# Altium PCB PIC0_D4_SD_card_T3.PcbDoc (part 1 of 2)
Units mm, origin at the board's own origin, x right, y up, seen from the top; angles counter-clockwise.
Board outline 20 x 34 mm, 2 copper layers (Top Layer, Bottom Layer), stack 1.671 mm thick; 52 components, 65 nets, 236 pads, 240 vias.
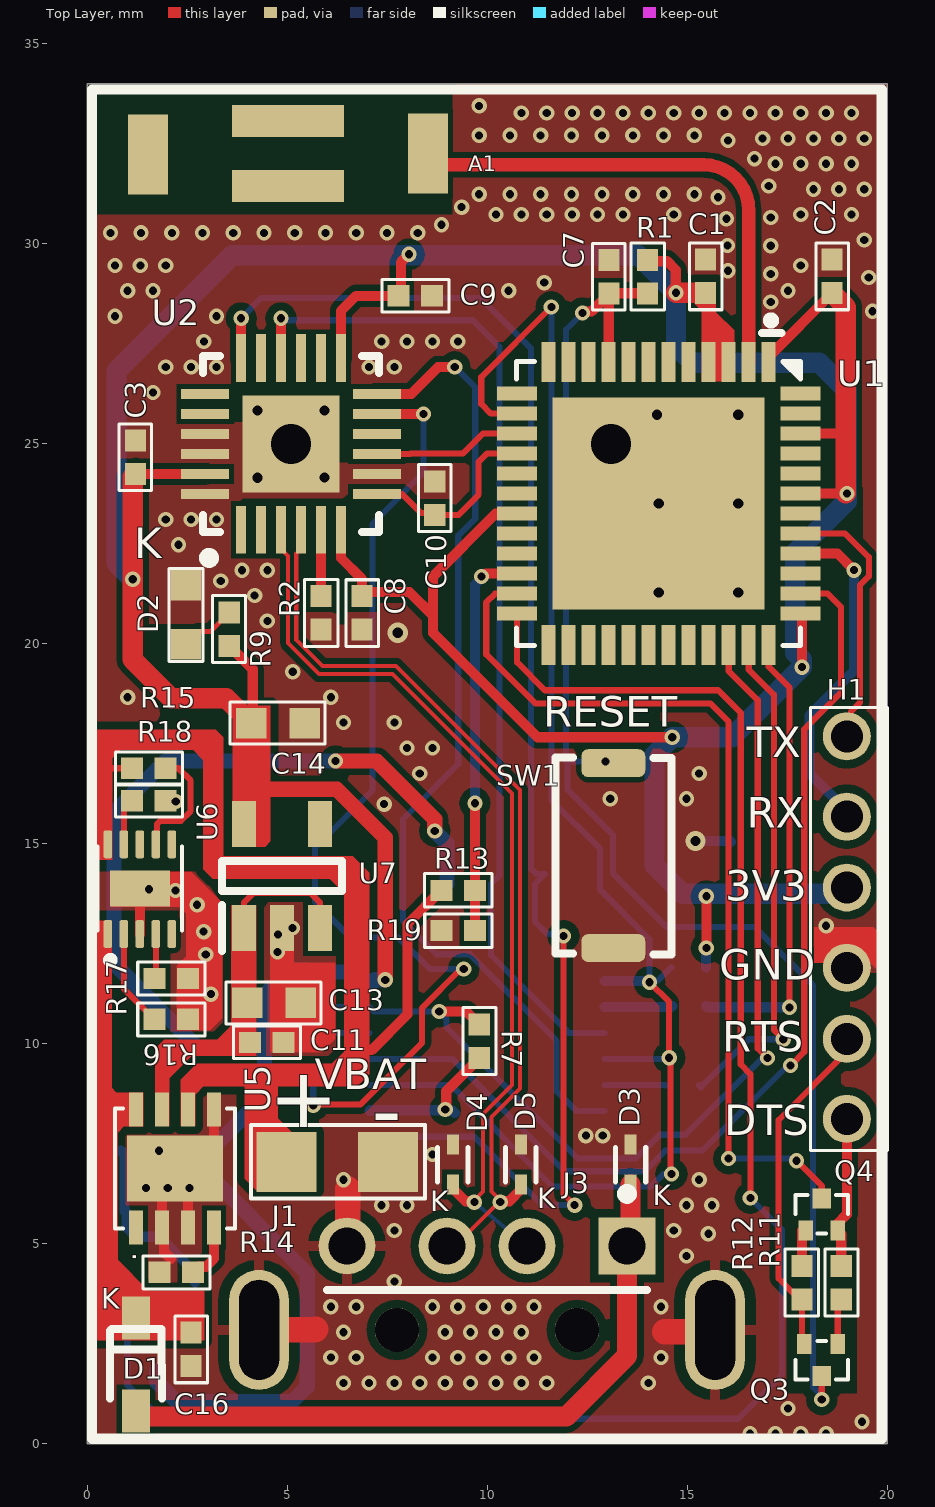
[diagram p0: Top Layer view]
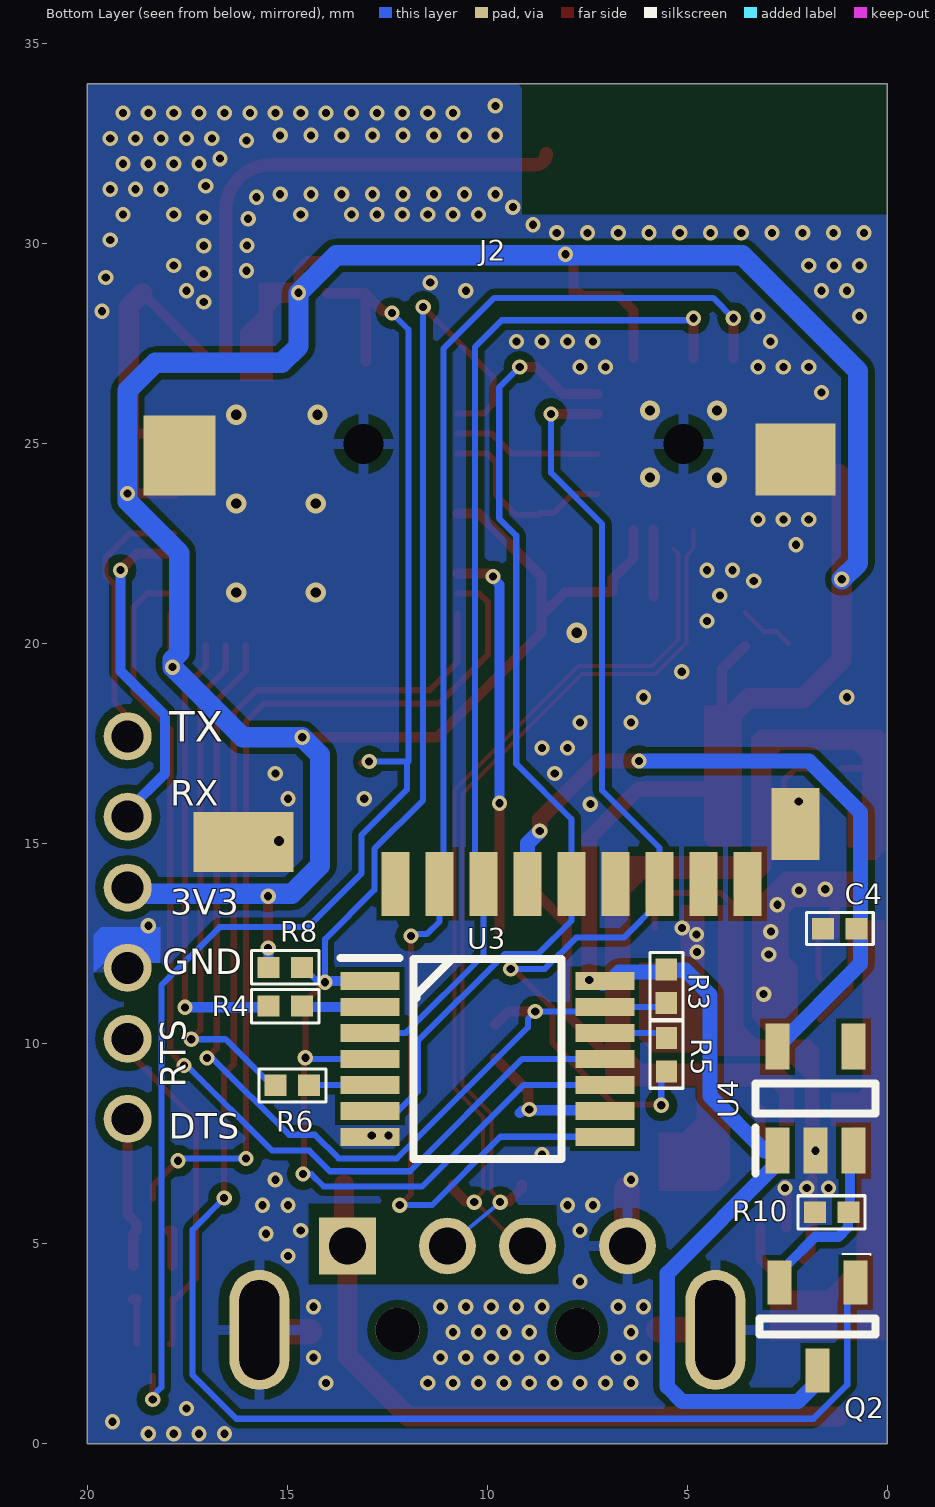
[diagram p1: Bottom Layer view, seen from below]

## Layer stack, top to bottom
Top Solder: solder mask 0.0102, Solder Resist, Dk 3.5
Top Layer: signal copper 0.0356
Dielectric 1: dielectric 1.6, FR-4, Dk 4.8
Bottom Layer: signal copper 0.0356
Bottom Solder: solder mask 0.0102, Solder Resist, Dk 3.5

## Board outline
0,0 20,0 20,34 0,34

## Design rules (kind name [scope] priority, off if disabled: settings)
Clearance [All] p1: gap=0.102 ignorepadtopadclearanceinfootprint=TRUE except(0: Arc-Text Track-Text SMDPad-Text THPad-Text Via-Text Fill-Text Poly-Text Region-Text Text-Text Text-Hole; 0.127: SMDPad-Fill SMDPad-Poly SMDPad-Region; 0.152: Arc-Fill Arc-Poly Arc-Region Track-Fill Track-Poly Track-Region; 0.203: THPad-Fill THPad-Poly THPad-Region Via-Fill Via-Poly Via-Region Fill-Fill Fill-Poly Fill-Region Poly-Poly Poly-Region Region-Region)
DiffPairsRouting DiffPair_DIFF90_DiffPairsRouting [InDifferentialPairClass('DIFF90')] p1: maxlimit=0.114 minlimit=0.114 mostfreqgap=0.114 toplayer_minwidth=0.101 toplayer_maxwidth=0.101 toplayer_prefwidth=0.101 bottomlayer_minwidth=0.101 bottomlayer_maxwidth=0.101 bottomlayer_prefwidth=0.101 maxuncoupledlength=0
MatchedLengths DiffPair_DIFF90_MatchedLengths [InDifferentialPairClass('DIFF90')] p1: tolerance=25.4 checknetsindiffpair=TRUE checkdiffpairvsdiffpair=FALSE checkxsignals=FALSE checkothers=FALSE usedelayunits=FALSE
PlaneConnect [All] p1: planeconnectstyle=Relief reliefexpansion=0.508 reliefentries=4 reliefconductorwidth=0.254 reliefairgap=0.127
PolygonConnect [All] p1: thpad.connectstyle=Relief thpad.reliefconductorwidth=0.254 thpad.reliefentries=4 thpad.polygonreliefangle="90 Angle" thpad.airgapwidth=0.254 smdpad.connectstyle=Direct smdpad.reliefconductorwidth=0.254 smdpad.reliefentries=4 smdpad.polygonreliefangle="90 Angle" smdpad.airgapwidth=0.254 via.connectstyle=Direct via.reliefconductorwidth=0.254 via.reliefentries=4 via.polygonreliefangle="90 Angle" via.airgapwidth=0.254
RoutingVias [All] p1: holewidth=0.203 width=0.381 viastyle="Through Hole" minholewidth=0.203 minwidth=0.381 maxholewidth=0.203 maxwidth=0.508
SilkToSilkClearance [All] p1: silktosilkclearance=0.102
SilkToSolderMaskClearance [IsPad] p1: minsilkscreentomaskgap=0.102 clearancetoexposedcopper=TRUE
SolderMaskExpansion [All] p1: expansion=0.102
Width [All] p1: maxlimit=12.7 minlimit=0.127 preferedwidth=0.254 minimp=50.000000 maximp=50.000000 favimp=50.000000
26 further rules are at their usual default settings.

## Classes and differential pairs
net class DIFF90: USB_N USB_P
differential pair USB: +USB_P -USB_N

## Components (designator, comment, footprint, x,y, rotation, side; value= is the part's Value field where it differs from the comment)
A1 "Ant" ANT_2450AT43B100E 5.029,32.258 r180 top
C1 "0.1uF" CAPC0402 15.461,29.195 r90 top
C2 "0.1uF" CAPC0402 18.626,29.195 r90 top
C3 "0.1uF" CAPC0402 1.212,24.663 r270 top
C4 "0.1uF" CAPC0402 1.196,12.88 r0 bottom
C7 "0.1uF" CAPC0402 13.048,29.175 r270 top
C8 "0.1uF" CAPC0402 6.872,20.775 r90 top
C9 "0.1uF" CAPC0402 8.204,28.702 r180 top
C10 "0.1uF" CAPC0402 8.695,23.641 r270 top
C11 "0.1uF" CAPC0402 4.496,10.033 r180 top
C13 "10uF" CAPC0603 4.674,11.024 r0 top
C14 "10uF" CAPC0603 4.775,18.016 r0 top
C16 "0.1uF" CAPC0402 2.597,2.369 r90 top
D1 "BAT760-7" SOD2513X120N 1.225,1.981 r270 top
D2 "RED LED" LED_0603 2.469,20.734 r90 top
D3 "ESD9X5.0ST5G" SOD-923 13.589,6.985 r90 top
D4 "ESD9X5.0ST5G" SOD-923 9.144,6.985 r90 top
D5 "ESD9X5.0ST5G" SOD-923 10.846,6.985 r90 top
H1 "HEADER 6" HEADER_2MM 18.996,12.907 r90 top
J1 "BAT" "HDR1X2H - DUPLICATE" 6.261,7.054 r0 top
J2 "DM3AT-SF-PEJM5(40)" "SD CARD CONNECTOR" 10,19.5 r0 bottom locked
J3 "USB MALE" MOLEX_48037-0001_0 10,3.9 r0 top locked
Q2 "Transistor NPN" SOT95P240X115-3N 1.747,2.937 r270 bottom
Q3 "MMBT2222AM3T5G" SOT-723#1 18.368,2.101 r180 top
Q4 "MMBT2222AM3T5G" SOT-723#2 18.368,5.74 r0 top
R1 "Res1" RESC0402 14.013,29.185 r90 top value=10k
R2 "" RESC0402 5.85,20.775 r90 top value=680R
R3 "Res1" RESC0402 5.531,11.444 r90 bottom value=10k
R4 "Res1" RESC0402 15.055,10.947 r180 bottom value=3.3k
R5 "" RESC0402 5.521,9.732 r270 bottom value=3.3k
R6 "" RESC0402 14.877,8.966 r180 bottom value=3.3k
R7 "" RESC0402 9.804,10.071 r90 top value=3.3k
R8 "Res1" RESC0402 15.055,11.912 r0 bottom value=10k
R9 "Res1" RESC0402 3.556,20.371 r270 top value=2k
R10 "Res1" resc0402 1.397,5.794 r180 bottom value=10k
R11 "Res1" resc0402 18.857,4.035 r90 top value=1k
R12 "Res1" resc0402 17.872,4.035 r270 top value=1k
R13 "Res1" resc0402 9.282,13.839 r180 top value=10k
R14 "" resc0402 2.235,4.293 r0 top value=680R
R15 "Res1" resc0402 1.549,16.891 r0 top value=10k
R16 "Res1" resc0402 2.108,10.617 r0 top value=1k
R17 "Res1" resc0402 2.108,11.633 r180 top value=2k
R18 "Res1" resc0402 1.549,16.078 r180 top value=10k
R19 "Res1" resc0402 9.284,12.834 r0 top value=10k
SW1 "SW PUSHBUTTON" Micro_push 13.157,14.707 r180 top
U1 "ESP32-PICO-D4" ESP32_PICO_D4_2 14.293,23.509 r270 top
U2 "GL823 Version A" QFN24-4X4MM 5.1,24.999 r90 top value=-
U3 "74ABT125PW_112" 74ABT125PW 10,9.627 r180 bottom locked
U4 "LDO_5V_3V" SOT25 1.8,8.63 r90 bottom value="LDO 5-3.3"
U5 "TPS2113ADRBR" SON-8 2.199,6.884 r90 top
U6 "BQ24040DSQR" 10-WFDFN 1.321,13.868 r90 top
U7 "LDO_5V_3V" SOT25 4.877,14.199 r90 top value="LDO 5-3.3"

## Footprints (in the part's own frame and the unit in brackets; to place one, negate y for a bottom-side part, rotate by r counter-clockwise, add the part's x,y. Pads: shape width x height; smd on the part's side, far side on the other; paste and mask are expansions set on the pad)
10-WFDFN [mm]
  rrect55% 0.7x0.22 smd: 1(-1.121,0.8) 2(-1.121,0.4) 3(-1.121,0) 4(-1.121,-0.4) 5(-1.121,-0.8) 6(1.121,-0.8) 7(1.121,-0.4) 8(1.121,0) 9(1.121,0.4) 10(1.121,0.8)
  rect 0.9x1.5 smd: 11(0.013,0)
  silkscreen extent -1.85,-1.06 1.06,1.06, body extent -1.04,-1.1 1.06,1.1, height 0.8
74ABT125PW [mm]
  rect 1.475x0.45 smd: 1(-2.938,1.95) 2(-2.938,1.3) 3(-2.938,0.65) 4(-2.938,0) 5(-2.938,-0.65) 6(-2.938,-1.3) 7(-2.938,-1.95) 8(2.938,-1.95) 9(2.938,-1.3) 10(2.938,-0.65) 11(2.938,0) 12(2.938,0.65) 13(2.938,1.3) 14(2.938,1.95)
  silkscreen extent -3.67,-2.5 1.85,2.52, body extent -3.2,-2.5 3.2,2.5, height 1.1
ANT_2450AT43B100E [mm]
  rect 1x2 smd: 1(-3.5,0) 4(3.5,0.025)
  rect 2.8x0.8 smd: 2(0,-0.815) 3(0,0.815)
  body extent -3.5,-1.04 3.5,1.04, height 2.1
CAPC0402 [mm]
  rect 0.55x0.53 smd: 1(-0.419,0) 2(0.419,0)
  silkscreen extent -0.84,-0.41 0.83,0.4, body extent -0.5,-0.3 0.5,0.3, height 0.2
CAPC0603 [mil]
  rect 30x30 smd: 1(-26.26,0) 2(26.26,0)
  silkscreen extent -47,-20 46,21, body extent -31,-16 31,16, height 9
ESP32_PICO_D4_2 [mm]
  rect 1x0.35 smd: 1(-3.54,2.75) 2(-3.54,2.25) 3(-3.54,1.75) 4(-3.54,1.25) 5(-3.54,0.75) 6(-3.54,0.25) 7(-3.54,-0.25) 8(-3.54,-0.75) 9(-3.54,-1.25) 10(-3.54,-1.75) 11(-3.54,-2.25) 12(-3.54,-2.75) 25(3.54,-2.75) 26(3.54,-2.25) 27(3.54,-1.75) 28(3.54,-1.25) 29(3.54,-0.75) 30(3.54,-0.25) 31(3.54,0.25) 32(3.54,0.75) 33(3.54,1.25) 34(3.54,1.75) 35(3.54,2.25) 36(3.54,2.75)
  rect 0.35x1 smd: 13(-2.75,-3.54) 14(-2.25,-3.54) 15(-1.75,-3.54) 16(-1.25,-3.54) 17(-0.75,-3.54) 18(-0.25,-3.54) 19(0.25,-3.54) 20(0.75,-3.54) 21(1.25,-3.54) 22(1.75,-3.54) 23(2.25,-3.54) 24(2.75,-3.54) 37(2.75,3.54) 38(2.25,3.54) 39(1.75,3.54) 40(1.25,3.54) 41(0.75,3.54) 42(0.25,3.54) 43(-0.25,3.54) 44(-0.75,3.54) 45(-1.25,3.54) 46(-1.75,3.54) 47(-2.25,3.54) 48(-2.75,3.54)
  rect 5.3x5.3 smd: 49(0,0)
  Top Layer pour cut-out: -2.652,2.422 -2.423,2.651 -2.653,2.651
  silkscreen extent -4.68,-3.55 3.55,3.55, body extent -3.5,-3.5 3.5,3.5, height 0.26
"HDR1X2H - DUPLICATE" [mm] "Connector; Header; 2 Position; Right Angle"
  rect 1.5x1.5 smd: 1(-1.27,0) 2(1.27,0)
  silkscreen extent -2.16,-0.91 2.18,0.91
HEADER_2MM [mm]
  round 1.2 hole 0.8: 1(-4.782,0) 2(-2.782,0) 3(-1.004,0) 4(1.003,0) 5(2.775,0) 6(4.782,0)
  silkscreen extent -5.57,-1.02 5.51,0.91
LED_0603 [mil]
  rect 30x30 smd: 1(-29.02,0) 2(29.02,0)
  silkscreen extent -46,-17 45,17, body extent -32,-14 32,14, height 25
Micro_push [mm]
  rrect50% 1.6x0.7 smd: 1(0,2.311) 2(0,-2.311)
  silkscreen extent -1.45,-2.45 1.45,2.46, body extent -1.45,-2.45 1.45,2.45, height 1.95
MOLEX_48037-0001_0 [mm]
  rect 1.42x1.42 hole 0.92 paste-1000 mask+0: 1(3.5,1.05)
  round 1.42 hole 0.92 paste-1000 mask+0: 2(1,1.05) 3(-1,1.05) 4(-3.5,1.05)
  oval 1.5x3 hole 1 slot 2.5 at 90 deg paste-1000 mask+0: 5(-5.7,-1.05) 6(5.7,-1.05)
  round 1.1 hole 1.1 unplated paste-1000 mask+0: ""(-2.25,-1.05) ""(2.25,-1.05)
  silkscreen extent -4,-0.05 4,2.47, body extent -6.3,-18.76 6.3,1.16, height 3
QFN24-4X4MM [mm] "QFN24L (4x4x1) 0.5 pitch_STPM32"
  rect 1.194x0.25 smd: 1(-2.147,1.25) 2(-2.147,0.75) 3(-2.147,0.25) 4(-2.147,-0.25) 5(-2.147,-0.75) 6(-2.147,-1.25) 13(2.147,-1.25) 14(2.147,-0.75) 15(2.147,-0.25) 16(2.147,0.25) 17(2.147,0.75) 18(2.147,1.25)
  rect 0.25x1.194 smd: 7(-1.25,-2.147) 8(-0.75,-2.147) 9(-0.25,-2.147) 10(0.25,-2.147) 11(0.75,-2.147) 12(1.25,-2.147) 19(1.25,2.147) 20(0.75,2.147) 21(0.25,2.147) 22(-0.25,2.147) 23(-0.75,2.147) 24(-1.25,2.147)
  rect 2.43x2.43 smd: 25(0,0)
  silkscreen extent -2.97,-2.2 2.2,2.2, body extent -2.05,-2.05 2.05,2.05, height 1
RESC0402 [mm]
  rect 0.55x0.53 smd: 1(0.419,0) 2(-0.419,0)
  silkscreen extent -0.84,-0.42 0.84,0.41, body extent -0.5,-0.25 0.5,0.25, height 0.26
resc0402 [mm]
  rect 0.55x0.53 smd: 1(0.419,0) 2(-0.419,0)
  silkscreen extent -0.84,-0.42 0.84,0.41, body extent -0.5,-0.25 0.5,0.25, height 0.31
"SD CARD CONNECTOR" [mm]
  rect 0.7x1.6 smd: 1(2.3,5.499) 2(1.2,5.499) 3(0.1,5.499) 4(-1,5.499) 5(-2.1,5.499) 6(-3.2,5.499) 7(-4.3,5.499) 8(-5.4,5.499) 9(-6.5,5.499)
  rect 2x1.8 smd: 6(-7.7,-5.109)
  rect 1.2x1.8 smd: 6(-7.7,3.999)
  round 0 hole 1: 6(-4.9,-5.499) 6(3.1,-5.499)
  rect 2.5x1.5 smd: 6(6.1,4.452)
  rect 1.8x2 smd: 6(7.7,-5.209)
  body extent -7.38,-9.9 6.47,6.25, height 1.68
SOD2513X120N [mm]
  rect 1.075x0.7 smd: 1(-1.162,0) 2(1.162,0)
  silkscreen extent -0.89,-0.65 0.85,0.65, body extent -1.34,-0.65 1.16,0.65, height 1.2
SOD-923 [mm]
  rect 0.5x0.3 smd: 1(-0.5,0) 2(0.5,0)
  silkscreen extent -0.43,-0.38 0.43,0.38, body extent -0.52,-0.32 0.53,0.32, height 0.43
SON-8 [mm]
  rect 0.85x0.35 smd: 1(-1.475,0.975) 2(-1.475,0.325) 3(-1.475,-0.325) 4(-1.475,-0.975) 5(1.475,-0.975) 6(1.475,-0.325) 7(1.475,0.325) 8(1.475,0.975)
  rect 1.65x2.4 smd: 9(0,0)
  Top Layer region: 0,1.2 0,1.2 0,1.2 0,1.2 0,1.2 0,1.2 0,1.2 0,1.2
  Top Layer region: 0,-1.2 0,-1.2 0,-1.2 0,-1.2 0,-1.2 0,-1.2 0,-1.2 0,-1.2
  silkscreen extent -1.5,-1.5 1.5,1.5, body extent -1.5,-1.5 1.5,1.5, height 0.77
SOT25 [mm]
  rect 1.15x0.6 smd: 1(-1.3,0.95) 2(-1.3,0) 3(-1.3,-0.95) 4(1.3,-0.95) 5(1.3,0.95)
  silkscreen extent -1.88,-1.5 0.38,1.5, body extent -1.45,-1.5 1.4,1.5, height 1.3
SOT95P240X115-3N [mm]
  rect 1.1x0.6 smd: 1(-1.1,0.95) 2(-1.1,-0.95) 3(1.1,0)
  silkscreen extent -1.81,-1.45 0.2,1.45, body extent -1.42,-1.5 1.42,1.5, height 1.1
SOT-723#1 [mm]
  rect 0.37x0.5 smd mask+0.05: 1(-0.4,-0.4) 2(0.437,-0.4)
  rect 0.47x0.5 smd mask+0.05: 3(0,0.4)
  silkscreen extent -0.66,-0.48 0.66,0.49, body extent -0.61,-0.53 0.64,0.52, height 0.45
SOT-723#2 [mm]
  rect 0.37x0.5 smd mask+0.05: 1(-0.4,-0.4) 2(0.4,-0.4)
  rect 0.47x0.5 smd mask+0.05: 3(0,0.4)
  silkscreen extent -0.66,-0.48 0.66,0.49, body extent -0.61,-0.53 0.64,0.52, height 0.45

## Part data
A1: "High Frequency Ceramic Solutions 4-Pin SMD T/R", Case/Package=SMD/SMT, Frequency=2.4GHz, Manufacturer=Johanson, Manufacturer Part Number=2450AT43B100E, Max Frequency=2.5GHz, Max Power Dissipation=2W, Package Quantity=1, Supplier Part Number 1=712-1010-1-ND, Category="RF Antennas", ComponentLink1Description=https://datasheet.ciiva.com/24068/2450at43b100-242468-24068034.pdf?src-supplier=Mouser, ComponentLink1URL=https://datasheet.ciiva.com/24068/2450at43b100-242468-24068034.pdf?src-supplier=Mouser, ComponentLink2Description=https://datasheet.ciiva.com/2792/jti-antenna-2450at43b100-09042008-2792593.pdf?src-supplier=Digi-Key, ComponentLink2URL=https://datasheet.ciiva.com/2792/jti-antenna-2450at43b100-09042008-2792593.pdf?src-supplier=Digi-Key, ComponentLink3Description=https://datasheet.ciiva.com/7633/1860765-7633973.pdf?src-supplier=Element14, ComponentLink3URL=https://datasheet.ciiva.com/7633/1860765-7633973.pdf?src-supplier=Element14, Contact Plating=Tin, Gain=-0.5dB, Height=0.079inch, Impedance=50R, Length=7mm, Mount="Surface Mount", Number of Bands=1, Number of Pins=4, Packaging="Tape and Reel", Power Rating=2W, Pricing 1="1=0.71000, 10=0.62400, 25=0.58600, 100=0.47820, 250=0.44416, 500=0.37800 (USD)", Radiation Hardening=No, REACH SVHC=Unknown, Return Loss=-9.5dB, RoHS=Yes, Stock 1=63050, Supplier 1=Digi-Key, Termination=Solder, Width=2mm
C1 C2 C3 C4 C7 C8 C9 C10 C11 C16: library part Cap, "Ceramic Capacitor,100nF,16V,0402", Capacitance=100nF, Case/Package=0402, Case Code (Metric)=1608, Dielectric=X7R, Dielectric Material=Ceramic, Manufacturer=TDK, Manufacturer Part Number=C1608X7R1C104K, Max Operating Temperature=125°C, Mfr.=C0805C104K1RECAUTO, Min Operating Temperature=-55°C, Package Quantity=1, Supplier Part Number 1=445-1317-6-ND, Tolerance=10%, Voltage Rating=16V, Case Code (Imperial)=0402, ComponentLink1Description=https://media.digikey.com/pdf/Data%20Sheets/TDK%20PDFs/C_Series_GeneralAppl_Spec_rev_0.3_201012.pdf?src-supplier=Digi-Key, ComponentLink1URL=https://media.digikey.com/pdf/Data%20Sheets/TDK%20PDFs/C_Series_GeneralAppl_Spec_rev_0.3_201012.pdf?src-supplier=Digi-Key, ComponentLink2Description=https://media.digikey.com/pdf/Data%20Sheets/TDK%20PDFs/C_Series_GeneralAppl_B11.pdf?src-supplier=Digi-Key, ComponentLink2URL=https://media.digikey.com/pdf/Data%20Sheets/TDK%20PDFs/C_Series_GeneralAppl_B11.pdf?src-supplier=Digi-Key, ComponentLink3Description=https://www.verical.com/server-webapp/html/getDatasheet?partID=169336&src-supplier=Verical, ComponentLink3URL=https://www.verical.com/server-webapp/html/getDatasheet?partID=169336&src-supplier=Verical, ComponentLink4Description=http://www.tdk.co.jp/tefe02/e412_c.pdf?src-supplier=Future+Electronics, ComponentLink4URL=http://www.tdk.co.jp/tefe02/e412_c.pdf?src-supplier=Future+Electronics, ComponentLink5Description=http://www.farnell.com/datasheets/1571323.pdf?src-supplier=Element14, ComponentLink5URL=http://www.farnell.com/datasheets/1571323.pdf?src-supplier=Element14, Composition=Ceramic, Depth=0.8mm, Height=0.8mm, Lead Free="Lead Free", Length=1.6mm, Mount="Surface Mount", Number of Pins=2, Packaging="Tape and Reel", Radiation Hardening=No, Stock 1=0, Supplier 1=Digi-Key, Termination=SMD/SMT, Thickness=0.037inch, Voltage Rating (DC)=16V, Width=0.8mm
C13 C14: library part "Cap Pol2", "Ceramic Capacitor,10uF,16V,0603", Case/Package=0603, Mfr. No=0603C106KAT2A
D1: "Schottky Diodes & Rectifiers 1A 30V LF1A, 2-Pin SOD-323", Case/Package=SOD-323, Manufacturer Part Number=BAT760-7
D2: library part LED1, "LED, RED,SMD, 0603", Case/Package=0603, Manufacturer Part Number="LED, RED,SMD, 0603"
D3 D4 D5: "12.3V Clamp 8.7A (8/20µs) Ipp Tvs Diode Surface Mount SOD-923", Breakdown Voltage=6.2V, Capacitance=65pF, Case/Package=SOD-923-2, Clamping Voltage=12.3V, Leakage Current=1uA, Manufacturer="ON Semiconductor", Max Operating Temperature=150°C, Max Power Dissipation=150mW, Max Surge Current=8.7A, Min Operating Temperature=-55°C, Operating Supply Voltage=5V, Package Quantity=1, Peak Pulse Power=107W, Power Line Protection=No, Supplier Part Number 1=ESD9X5.0ST5GOSCT-ND, Test Current=1mA, Category="ESD and Circuit Protection ICs", ComponentLink1Description=https://datasheet.ciiva.com/30478/0900766b812769b5-30478676.pdf?src-supplier=RSComponents, ComponentLink1URL=https://datasheet.ciiva.com/30478/0900766b812769b5-30478676.pdf?src-supplier=RSComponents, ComponentLink2Description=https://datasheet.ciiva.com/25958/esd9x3-3st5g-d-25958458.pdf?src-supplier=Avnet+Europe, ComponentLink2URL=https://datasheet.ciiva.com/25958/esd9x3-3st5g-d-25958458.pdf?src-supplier=Avnet+Europe, ComponentLink3Description=https://datasheet.ciiva.com/1219/1748783-1219324.pdf?src-supplier=Newark, ComponentLink3URL=https://datasheet.ciiva.com/1219/1748783-1219324.pdf?src-supplier=Newark, ComponentLink4Description=https://datasheet.ciiva.com/3304/esd9x3-3st5g-d-3304012.pdf?src-supplier=Avnet, ComponentLink4URL=https://datasheet.ciiva.com/3304/esd9x3-3st5g-d-3304012.pdf?src-supplier=Avnet, ComponentLink5Description=https://datasheet.ciiva.com/339/esd9x3-3st5g-d-339709.pdf?src-supplier=Digi-Key, ComponentLink5URL=https://datasheet.ciiva.com/339/esd9x3-3st5g-d-339709.pdf?src-supplier=Digi-Key, ComponentLink6Description=https://datasheet.ciiva.com/16215/esd9x3-3st5g-d-16215149.pdf?src-supplier=Future+Electronics, ComponentLink6URL=https://datasheet.ciiva.com/16215/esd9x3-3st5g-d-16215149.pdf?src-supplier=Future+Electronics, ComponentLink7Description=https://datasheet.ciiva.com/339/esd9x3-3st5g-d-339710.pdf?src-supplier=Digi-Key, ComponentLink7URL=https://datasheet.ciiva.com/339/esd9x3-3st5g-d-339710.pdf?src-supplier=Digi-Key, ComponentLink8Description=https://datasheet.ciiva.com/339/esd9x3-3st5g-d-339711.pdf?src-supplier=Digi-Key, ComponentLink8URL=https://datasheet.ciiva.com/339/esd9x3-3st5g-d-339711.pdf?src-supplier=Digi-Key, Composition=Zener, Contact Plating=Tin,Matte, Depth=0.6mm, Direction=Unidirectional, Element Configuration=Single, ESD Protection=Yes, Halogen Free="Halogen Free", Height=0.4mm, Lead Free="Lead Free", Length=0.8mm, Manufacturer Part Number=ESD9X5.0ST5G, Max Breakdown Voltage=6.2V, Max Reverse Leakage Current=1uA, Min Breakdown Voltage=6.2V, Number of Channels=1, Number of Elements=1, Number of Lines=1, Number of Pins=2, Number of Unidirectional Channels=1, Packaging="Tape and Reel", Peak Pulse Current=8.7A, Polarity=Unidirectional, Pricing 1="1=0.14000, 10=0.12700, 25=0.12120, 100=0.05340, 250=0.05120, 500=0.04190, 1000=0.02910, 2500=0.02542 (USD)", Radiation Hardening=No, REACH SVHC="No SVHC", Reverse Breakdown Voltage=6.2V, Reverse Standoff Voltage=5V, RoHS=Yes, Stock 1=835133, Supplier 1=Digi-Key, Termination=SMD/SMT, Width=0.65mm, Working Voltage=5V
H1: "Header, 6-Pin,2MM", Case/Package=TH, Manufacturer Part Number="2mm PITCH"
J1: library part "Header 2 pin"
J2: "Micro SD Memory Card Socket", Manufacturer_Name=Hirose, Mouser Part Number=798-DM3AT-SF-PEJM540, RS Part Number=7079520P, Allied_Number=R1050628, Allied Price/Stock=http://www.alliedelec.com/hirose-electric-dm3at-sf-pejm5-40-/R1050628/, Datasheet Link=http://uk.rs-online.com/web/p/products/7079520, Manufacturer Part Number=DM3AT-SF-PEJM5(40), Mouser Price/Stock=https://www.mouser.com/Search/Refine.aspx?Keyword=798-DM3AT-SF-PEJM540, RS Price/Stock=http://uk.rs-online.com/web/p/products/7079520P
J3: "USB A-type Plug Male PCB R/A", Case/Package=TH, Manufacturer Part Number="USB Type A male"
Q2: "Bipolar Transistors - Pre-Biased 100mA 50V BRT NPN", Case/Package=SOT-23-3, Collector Emitter Breakdown Voltage=50V, Collector Emitter Saturation Voltage=250mV, Continuous Collector Current=100mA, Manufacturer="ON Semiconductor", Manufacturer Part Number=MMUN2214LT1G, Max Operating Temperature=150°C, Max Power Dissipation=246mW, Min Operating Temperature=-55°C, Package Quantity=1, Supplier Part Number 1=863-MMUN2214LT1G, Collector Emitter Voltage (VCEO)=50V, ComponentLink1Description=http://www.onsemi.ru.com/pub/Collateral/DTC114Y-D.PDF?src-supplier=Avnet+Europe, ComponentLink1URL=http://www.onsemi.ru.com/pub/Collateral/DTC114Y-D.PDF?src-supplier=Avnet+Europe, ComponentLink2Description=https://www.verical.com/server-webapp/html/getDatasheet?partID=38473&src-supplier=Verical, ComponentLink2URL=https://www.verical.com/server-webapp/html/getDatasheet?partID=38473&src-supplier=Verical, ComponentLink3Description=http://www.onsemi.com/pub/Collateral/DTC114Y-D.PDF?src-supplier=Digi-Key, ComponentLink3URL=http://www.onsemi.com/pub/Collateral/DTC114Y-D.PDF?src-supplier=Digi-Key, ComponentLink4Description=http://www.onsemi.com/pub/Collateral/DTC114Y-D.PDF?src-supplier=Future+Electronics, ComponentLink4URL=http://www.onsemi.com/pub/Collateral/DTC114Y-D.PDF?src-supplier=Future+Electronics, Contact Plating=Tin,Matte, Current Rating=100mA, Element Configuration=Single, Halogen Free="Halogen Free", Height=0.94mm, hFE Min=80, Lead Free="Lead Free", Length=2.9mm, Max Breakdown Voltage=50V, Max Collector Current=100mA, Max Output Current=100mA, Number of Pins=3, Operating Supply Voltage=50V, Packaging="Tape and Reel", Polarity=NPN, Power Dissipation=246mW, Pricing 1="1=0.12, 10=0.105, 50=0.105, 100=0.037, 1000=0.025, 10000=0.017 (USD)", Radiation Hardening=No, REACH SVHC="No SVHC", Stock 1=56410, Supplier 1=Mouser, Voltage Rating (DC)=50V, Width=1.3mm
Q3 Q4: "Bipolar Transistors - BJT SS SOT-723 GP TRANSISTOR NPN", Case/Package=SOT-723-3, Collector Base Voltage (VCBO)=75V, Collector Emitter Breakdown Voltage=40V, Emitter Base Voltage (VEBO)=6V, Frequency=300MHz, Manufacturer="ON Semiconductor", Max Collector Current=600mA, Max Operating Temperature=150°C, Max Power Dissipation=640mW, Min Operating Temperature=-55°C, Package Quantity=1, Supplier Part Number 1=863-MMBT2222AM3T5G, Collector Emitter Voltage (VCEO)=40V, ComponentLink1Description="Manufacturer Link", ComponentLink1URL=http://www.fairchildsemi.com/, ComponentLink2Description=Datasheet, ComponentLink2URL=http://www.fairchildsemi.com/ds/2N%2F2N3904.pdf, ComponentLink3Description=http://www.mouser.com/ds/2/308/MMBT2222AM3-D-107843.pdf?src-supplier=Mouser, ComponentLink3URL=http://www.mouser.com/ds/2/308/MMBT2222AM3-D-107843.pdf?src-supplier=Mouser, ComponentLink4Description=https://4donline.ihs.com/images/VipMasterIC/IC/ONSM/ONSM-S-A0003065668/ONSM-S-A0003065668-1.pdf?hkey=52A5661711E402568146F3353EA87419&src-supplier=Element14, ComponentLink4URL=https://4donline.ihs.com/images/VipMasterIC/IC/ONSM/ONSM-S-A0003065668/ONSM-S-A0003065668-1.pdf?hkey=52A5661711E402568146F3353EA87419&src-supplier=Element14, ComponentLink5Description=http://www.onsemi.com/pub/Collateral/MMBT2222AM3-D.PDF?src-supplier=Avnet, ComponentLink5URL=http://www.onsemi.com/pub/Collateral/MMBT2222AM3-D.PDF?src-supplier=Avnet, ComponentLink6Description=http://www.onsemi.com/pub/Collateral/MMBT2222AM3-D.PDF?src-supplier=Digi-Key, ComponentLink6URL=http://www.onsemi.com/pub/Collateral/MMBT2222AM3-D.PDF?src-supplier=Digi-Key, ComponentLink7Description=https://www.verical.com/server-webapp/html/getDatasheet?partID=185710&src-supplier=Verical, ComponentLink7URL=https://www.verical.com/server-webapp/html/getDatasheet?partID=185710&src-supplier=Verical, ComponentLink8Description=http://www.onsemi.com/pub/Collateral/MMBT2222AM3-D.PDF?src-supplier=Avnet+Europe, ComponentLink8URL=http://www.onsemi.com/pub/Collateral/MMBT2222AM3-D.PDF?src-supplier=Avnet+Europe, ComponentLink9Description=http://www.onsemi.com/pub_link/Collateral/MMBT2222AM3-D.PDF?src-supplier=Future+Electronics, ComponentLink9URL=http://www.onsemi.com/pub_link/Collateral/MMBT2222AM3-D.PDF?src-supplier=Future+Electronics, Contact Plating=Tin,Matte, Element Configuration=Single, Gain Bandwidth Product=300MHz, Lead Free="Lead Free", Manufacturer Part Number=MMBT2222AM3T5G, Max Breakdown Voltage=40V, Max Frequency=300MHz, Number of Elements=1, Number of Pins=3, Packaging="Tape and Reel", Polarity=NPN, Power Dissipation=640mW, Pricing 1="1=0.2, 10=0.135, 50=0.135, 100=0.057, 1000=0.039, 2500=0.03, 8000=0.026, 10000=0.026, 24000=0.024, 48000=0.023 (USD)", Radiation Hardening=No, REACH SVHC="No SVHC", Stock 1=18115, Supplier 1=Mouser, Transition Frequency=300MHz
R1 R3 R8: "Thick Film Resistor -  10Kohm, 1%, 0402", Case/Package=0402, Case Code (Metric)=1005, Manufacturer=Vishay, Manufacturer Part Number=CRCW040210K0FKED, Max Operating Temperature=155°C, Max Power Dissipation=63mW, Min Operating Temperature=-55°C, Package Quantity=10, Supplier Part Number 1=71-CRCW0402-10K-E3, Temperature Coefficient=100ppm/°C, Tolerance=1%, Voltage Rating=50V, Case Code (Imperial)=0402, ComponentLink1Description=http://uk.rs-online.com/webdocs/0d98/0900766b80d98824.pdf?src-supplier=RSComponents, ComponentLink1URL=http://uk.rs-online.com/webdocs/0d98/0900766b80d98824.pdf?src-supplier=RSComponents, ComponentLink2Description=http://www.vishay.com/docs/20035/dcrcwe3.pdf?src-supplier=Digi-Key, ComponentLink2URL=http://www.vishay.com/docs/20035/dcrcwe3.pdf?src-supplier=Digi-Key, ComponentLink3Description=http://www.farnell.com/datasheets/2045673.pdf?src-supplier=Element14, ComponentLink3URL=http://www.farnell.com/datasheets/2045673.pdf?src-supplier=Element14, ComponentLink4Description=http://www.vishay.com/docs/20035/dcrcwe3.pdf?src-supplier=Avnet, ComponentLink4URL=http://www.vishay.com/docs/20035/dcrcwe3.pdf?src-supplier=Avnet, ComponentLink5Description=https://www.distrelec.biz/Web/Downloads/a_/en/flD-CRCW-e3_data_en.pdf?mime=application%2Fpdf&src-supplier=Distrelec, ComponentLink5URL=https://www.distrelec.biz/Web/Downloads/a_/en/flD-CRCW-e3_data_en.pdf?mime=application%2Fpdf&src-supplier=Distrelec, ComponentLink6Description=http://www.vishay.com/docs/20035/dcrcwe3.pdf?src-supplier=Mouser, ComponentLink6URL=http://www.vishay.com/docs/20035/dcrcwe3.pdf?src-supplier=Mouser, ComponentLink7Description=http://www.farnell.com/datasheets/2111203.pdf?src-supplier=Element14, ComponentLink7URL=http://www.farnell.com/datasheets/2111203.pdf?src-supplier=Element14, ComponentLink8Description=http://www.vishay.com/docs/20035/dcrcwe3.pdf?src-supplier=Future+Electronics, ComponentLink8URL=http://www.vishay.com/docs/20035/dcrcwe3.pdf?src-supplier=Future+Electronics, Composition="Thick Film", Contact Plating=Tin, Depth=0.5mm, Features="Automotive AEC-Q200", Height=0.35mm, Lead Free="Lead Free", Length=1mm, Military Standard=Not, Mount="Surface Mount", Number of Pins=2, Number of Terminations=2, Packaging="Tape and Reel", Power Rating=63mW, Pricing 1="1=0.1, 10=0.042, 50=0.042, 100=0.029, 1000=0.016, 10000=0.011 (USD)", Radiation Hardening=No, REACH SVHC=Unknown, Stock 1=7743, Supplier 1=Mouser, Termination=SMD/SMT, Voltage Rating (DC)=50V, Weight=2.3E-05oz, Width=0.02inch
R2 R14: library part Res1, "Thick Film Resistor - 680 ohm, 1%, 0402", Case/Package=0402, Case Code (Metric)=1005, Manufacturer=Panasonic, Manufacturer Part Number=ERA-2AEB681X, Max Operating Temperature=155°C, Max Power Dissipation=63mW, Min Operating Temperature=-55°C, Package Quantity=1, Supplier Part Number 1=667-ERA-2AEB681X, Temperature Coefficient=25ppm/°C, Tolerance=0.1%, Voltage Rating=25V, Case Code (Imperial)=0402, ComponentLink1Description=http://www.farnell.com/datasheets/1678796.pdf?src-supplier=Element14, ComponentLink1URL=http://www.farnell.com/datasheets/1678796.pdf?src-supplier=Element14, ComponentLink2Description=http://www.farnell.com/datasheets/2059623.pdf?src-supplier=Element14, ComponentLink2URL=http://www.farnell.com/datasheets/2059623.pdf?src-supplier=Element14, ComponentLink3Description=http://industrial.panasonic.com/www-cgi/jvcr13pz.cgi?E+PZ+3+AOA0002+ERJ1GNJ120C+7+WW?src-supplier=Mouser, ComponentLink3URL=http://industrial.panasonic.com/www-cgi/jvcr13pz.cgi?E+PZ+3+AOA0002+ERJ1GNJ120C+7+WW?src-supplier=Mouser, ComponentLink4Description=http://industrial.panasonic.com/www-data/pdf/AOA0000/AOA0000CE1.pdf?src-supplier=Avnet+Europe, ComponentLink4URL=http://industrial.panasonic.com/www-data/pdf/AOA0000/AOA0000CE1.pdf?src-supplier=Avnet+Europe, ComponentLink5Description=http://www.jameco.com/Jameco/Products/ProdDS/2007265.pdf?src-supplier=Jameco, ComponentLink5URL=http://www.jameco.com/Jameco/Products/ProdDS/2007265.pdf?src-supplier=Jameco, ComponentLink6Description=http://industrial.panasonic.com/www-data/pdf/AOA0000/AOA0000CE1.pdf?src-supplier=Avnet, ComponentLink6URL=http://industrial.panasonic.com/www-data/pdf/AOA0000/AOA0000CE1.pdf?src-supplier=Avnet, ComponentLink7Description=https://industrial.panasonic.com/cdbs/www-data/pdf/RDA0000/AOA0000C301.pdf?src-supplier=Future+Electronics, ComponentLink7URL=https://industrial.panasonic.com/cdbs/www-data/pdf/RDA0000/AOA0000C301.pdf?src-supplier=Future+Electronics, ComponentLink8Description=http://www.mouser.com/ds/2/315/AOA0000CE26-197354.pdf?src-supplier=Mouser, ComponentLink8URL=http://www.mouser.com/ds/2/315/AOA0000CE26-197354.pdf?src-supplier=Mouser, ComponentLink9Description=http://www.farnell.com/datasheets/328837.pdf?src-supplier=Element14, ComponentLink9URL=http://www.farnell.com/datasheets/328837.pdf?src-supplier=Element14, ComponentLink10Description=http://uk.rs-online.com/webdocs/0bee/0900766b80beefcc.pdf?src-supplier=RSComponents, ComponentLink10URL=http://uk.rs-online.com/webdocs/0bee/0900766b80beefcc.pdf?src-supplier=RSComponents, ComponentLink11Description=http://industrial.panasonic.com/www-data/pdf/AOA0000/AOA0000CE26.pdf?src-supplier=Avnet+Europe, ComponentLink11URL=http://industrial.panasonic.com/www-data/pdf/AOA0000/AOA0000CE26.pdf?src-supplier=Avnet+Europe, Composition="Thin Film,Metal Film", Contact Plating=Tin, Depth=0.5mm, Features="Automotive AEC-Q200", Height=0.35mm, Lead Free="Lead Free", Length=1mm, Military Standard=Not, Mount="Surface Mount", Number of Pins=2, Number of Terminations=2, Packaging="Tape and Reel", Power Rating=63mW, Pricing 1="1=0.59, 10=0.585, 50=0.585, 100=0.162, 1000=0.104, 10000=0.057 (USD)", Radiation Hardening=No, REACH SVHC="No SVHC", Stock 1=13785, Supplier 1=Mouser, Termination=SMD/SMT, Voltage Rating (DC)=25V, Width=0.02inch
R4: "Thick Film Resistor - 3.3 Kohm, 1%, 0402", Case/Package=0402, Manufacturer="Vishay Dale", Manufacturer Part Number=CRCW04023K30JNED, Max Operating Temperature=155°C, Max Power Dissipation=63mW, Min Operating Temperature=-55°C, Package Quantity=1, Temperature Coefficient=200ppm/°C, Tolerance=5%, Voltage Rating=50V, ComponentLink1Description=https://www.verical.com/server-webapp/html/getDatasheet?partID=33137&src-supplier=Verical, ComponentLink1URL=https://www.verical.com/server-webapp/html/getDatasheet?partID=33137&src-supplier=Verical, ComponentLink2Description=http://www.vishay.com/docs/20035/dcrcwe3.pdf?src-supplier=Avnet, ComponentLink2URL=http://www.vishay.com/docs/20035/dcrcwe3.pdf?src-supplier=Avnet, ComponentLink3Description=https://www.alliedelec.com/m/d/0c934d6939ccefa68dbe0b96d821c8cf.pdf?src-supplier=Allied+Electronics, ComponentLink3URL=https://www.alliedelec.com/m/d/0c934d6939ccefa68dbe0b96d821c8cf.pdf?src-supplier=Allied+Electronics, ComponentLink4Description=http://www.vishay.com/docs/20035/dcrcwe3.pdf?src-supplier=Digi-Key, ComponentLink4URL=http://www.vishay.com/docs/20035/dcrcwe3.pdf?src-supplier=Digi-Key, Composition="Thick Film", Contact Plating=Tin, Depth=0.5mm, Features="Automotive AEC-Q200", Height=0.35mm, Lead Free="Lead Free", Length=1mm, Military Standard=Not, Number of Pins=2, Number of Terminations=2, Packaging="Tape and Reel", Power Rating=63mW, Radiation Hardening=No, REACH SVHC=Unknown, Stock 1=0, Supplier 1=Arrow, Supplier Part Number 1=CRCW04023K30JNED, Termination=SMD/SMT, Voltage Rating (DC)=50V, Weight=2.3E-05oz, Width=0.5mm
R5 R6 R7: library part Res1, "Thick Film Resistor - 3.3 Kohm, 1%, 0402", Case/Package=0402, Manufacturer="Vishay Dale", Manufacturer Part Number=CRCW04023K30JNED, Max Operating Temperature=155°C, Max Power Dissipation=63mW, Min Operating Temperature=-55°C, Package Quantity=1, Temperature Coefficient=200ppm/°C, Tolerance=5%, Voltage Rating=50V, ComponentLink1Description=https://www.verical.com/server-webapp/html/getDatasheet?partID=33137&src-supplier=Verical, ComponentLink1URL=https://www.verical.com/server-webapp/html/getDatasheet?partID=33137&src-supplier=Verical, ComponentLink2Description=http://www.vishay.com/docs/20035/dcrcwe3.pdf?src-supplier=Avnet, ComponentLink2URL=http://www.vishay.com/docs/20035/dcrcwe3.pdf?src-supplier=Avnet, ComponentLink3Description=https://www.alliedelec.com/m/d/0c934d6939ccefa68dbe0b96d821c8cf.pdf?src-supplier=Allied+Electronics, ComponentLink3URL=https://www.alliedelec.com/m/d/0c934d6939ccefa68dbe0b96d821c8cf.pdf?src-supplier=Allied+Electronics, ComponentLink4Description=http://www.vishay.com/docs/20035/dcrcwe3.pdf?src-supplier=Digi-Key, ComponentLink4URL=http://www.vishay.com/docs/20035/dcrcwe3.pdf?src-supplier=Digi-Key, Composition="Thick Film", Contact Plating=Tin, Depth=0.5mm, Features="Automotive AEC-Q200", Height=0.35mm, Lead Free="Lead Free", Length=1mm, Military Standard=Not, Number of Pins=2, Number of Terminations=2, Packaging="Tape and Reel", Power Rating=63mW, Radiation Hardening=No, REACH SVHC=Unknown, Stock 1=0, Supplier 1=Arrow, Supplier Part Number 1=CRCW04023K30JNED, Termination=SMD/SMT, Voltage Rating (DC)=50V, Weight=2.3E-05oz, Width=0.5mm
R9 R17: "Thick Film Resistor -  2Kohm, 1%, 0402", Case/Package=0402, Manufacturer="Vishay Semiconductors", Manufacturer Part Number=CRCW04022K00FKEDC, Max Operating Temperature=155°C, Min Operating Temperature=-55°C, Power Rating=62.5mW, Supplier Part Number 1=71-CRCW04022K00FKEDC, Temperature Coefficient=100ppm/°C, Tolerance=1%, Composition="Thick Film", Contact Plating=Tin, Lead Free="Lead Free", Length=1mm, Mount="Surface Mount", Pricing 1="1=0.12, 10=0.05, 50=0.05, 100=0.026, 1000=0.014, 10000=0.008 (USD)", Stock 1=219981, Supplier 1=Mouser, Termination=Wraparound
R10 R13 R15 R18 R19: "Thick Film Resistor -  10Kohm, 1%, 0402", Case/Package=0402, Manufacturer=Vishay, Manufacturer Part Number=CRCW040210K0FKED, Max Operating Temperature=155°C, Max Power Dissipation=63mW, Min Operating Temperature=-55°C, Package Quantity=10, Supplier Part Number 1=71-CRCW0402-10K-E3, Temperature Coefficient=100ppm/°C, Tolerance=1%, Voltage Rating=50V, ComponentLink1Description=http://uk.rs-online.com/webdocs/0d98/0900766b80d98824.pdf?src-supplier=RSComponents, ComponentLink1URL=http://uk.rs-online.com/webdocs/0d98/0900766b80d98824.pdf?src-supplier=RSComponents, ComponentLink2Description=http://www.vishay.com/docs/20035/dcrcwe3.pdf?src-supplier=Digi-Key, ComponentLink2URL=http://www.vishay.com/docs/20035/dcrcwe3.pdf?src-supplier=Digi-Key, ComponentLink3Description=http://www.farnell.com/datasheets/2045673.pdf?src-supplier=Element14, ComponentLink3URL=http://www.farnell.com/datasheets/2045673.pdf?src-supplier=Element14, ComponentLink4Description=http://www.vishay.com/docs/20035/dcrcwe3.pdf?src-supplier=Avnet, ComponentLink4URL=http://www.vishay.com/docs/20035/dcrcwe3.pdf?src-supplier=Avnet, ComponentLink5Description=https://www.distrelec.biz/Web/Downloads/a_/en/flD-CRCW-e3_data_en.pdf?mime=application%2Fpdf&src-supplier=Distrelec, ComponentLink5URL=https://www.distrelec.biz/Web/Downloads/a_/en/flD-CRCW-e3_data_en.pdf?mime=application%2Fpdf&src-supplier=Distrelec, ComponentLink6Description=http://www.vishay.com/docs/20035/dcrcwe3.pdf?src-supplier=Mouser, ComponentLink6URL=http://www.vishay.com/docs/20035/dcrcwe3.pdf?src-supplier=Mouser, ComponentLink7Description=http://www.farnell.com/datasheets/2111203.pdf?src-supplier=Element14, ComponentLink7URL=http://www.farnell.com/datasheets/2111203.pdf?src-supplier=Element14, ComponentLink8Description=http://www.vishay.com/docs/20035/dcrcwe3.pdf?src-supplier=Future+Electronics, ComponentLink8URL=http://www.vishay.com/docs/20035/dcrcwe3.pdf?src-supplier=Future+Electronics, Composition="Thick Film", Contact Plating=Tin, Depth=0.5mm, Features="Automotive AEC-Q200", Height=0.35mm, Lead Free="Lead Free", Length=1mm, Military Standard=Not, Mount="Surface Mount", Number of Pins=2, Number of Terminations=2, Packaging="Tape and Reel", Power Rating=63mW, Pricing 1="1=0.1, 10=0.042, 50=0.042, 100=0.029, 1000=0.016, 10000=0.011 (USD)", Radiation Hardening=No, REACH SVHC=Unknown, Stock 1=7743, Supplier 1=Mouser, Termination=SMD/SMT, Voltage Rating (DC)=50V, Weight=2.3E-05oz, Width=0.02inch
R11 R12 R16: "Thick Film Resistor -  1Kohm, 1%, 0402", Case/Package=0402, Case Code (Metric)=1005, Manufacturer="TE Connectivity", Manufacturer Part Number=CRGCQ0402F1K0, Max Operating Temperature=155°C, Max Power Dissipation=63mW, Min Operating Temperature=-55°C, Supplier Part Number 1=279-CRGCQ0402F1K0, Temperature Coefficient=100ppm/°C, Tolerance=1%, Case Code (Imperial)=0402, ComponentLink1Description=http://uk.rs-online.com/webdocs/0d98/0900766b80d98824.pdf?src-supplier=RSComponents, ComponentLink1URL=http://uk.rs-online.com/webdocs/0d98/0900766b80d98824.pdf?src-supplier=RSComponents, ComponentLink2Description=http://www.vishay.com/docs/20035/dcrcwe3.pdf?src-supplier=Digi-Key, ComponentLink2URL=http://www.vishay.com/docs/20035/dcrcwe3.pdf?src-supplier=Digi-Key, ComponentLink3Description=http://www.farnell.com/datasheets/2045673.pdf?src-supplier=Element14, ComponentLink3URL=http://www.farnell.com/datasheets/2045673.pdf?src-supplier=Element14, ComponentLink4Description=http://www.vishay.com/docs/20035/dcrcwe3.pdf?src-supplier=Avnet, ComponentLink4URL=http://www.vishay.com/docs/20035/dcrcwe3.pdf?src-supplier=Avnet, ComponentLink5Description=https://www.distrelec.biz/Web/Downloads/a_/en/flD-CRCW-e3_data_en.pdf?mime=application%2Fpdf&src-supplier=Distrelec, ComponentLink5URL=https://www.distrelec.biz/Web/Downloads/a_/en/flD-CRCW-e3_data_en.pdf?mime=application%2Fpdf&src-supplier=Distrelec, ComponentLink6Description=http://www.vishay.com/docs/20035/dcrcwe3.pdf?src-supplier=Mouser, ComponentLink6URL=http://www.vishay.com/docs/20035/dcrcwe3.pdf?src-supplier=Mouser, ComponentLink7Description=http://www.farnell.com/datasheets/2111203.pdf?src-supplier=Element14, ComponentLink7URL=http://www.farnell.com/datasheets/2111203.pdf?src-supplier=Element14, ComponentLink8Description=http://www.vishay.com/docs/20035/dcrcwe3.pdf?src-supplier=Future+Electronics, ComponentLink8URL=http://www.vishay.com/docs/20035/dcrcwe3.pdf?src-supplier=Future+Electronics, ComponentLink9Description=https://www.te.com/commerce/DocumentDelivery/DDEController?Action=srchrtrv&amp;DocNm=1773204-3&amp;DocType=DS&amp;DocLang=English&src-supplier=Digi-Key, ComponentLink9URL=https://www.te.com/commerce/DocumentDelivery/DDEController?Action=srchrtrv&amp;DocNm=1773204-3&amp;DocType=DS&amp;DocLang=English&src-supplier=Digi-Key, ComponentLink10Description=https://4donline.ihs.com/images/VipMasterIC/IC/TYEL/TYEL-S-A0004929575/TYEL-S-A0004929575-1.pdf?hkey=52A5661711E402568146F3353EA87419&src-supplier=Farnell, ComponentLink10URL=https://4donline.ihs.com/images/VipMasterIC/IC/TYEL/TYEL-S-A0004929575/TYEL-S-A0004929575-1.pdf?hkey=52A5661711E402568146F3353EA87419&src-supplier=Farnell, ComponentLink11Description=https://4donline.ihs.com/images/VipMasterIC/IC/TYEL/TYEL-S-A0004929575/TYEL-S-A0004929575-1.pdf?hkey=52A5661711E402568146F3353EA87419&src-supplier=Newark, ComponentLink11URL=https://4donline.ihs.com/images/VipMasterIC/IC/TYEL/TYEL-S-A0004929575/TYEL-S-A0004929575-1.pdf?hkey=52A5661711E402568146F3353EA87419&src-supplier=Newark, Composition="Thick Film", Features="Moisture Resistant,Automotive AEC-Q200", Number of Terminations=2, Packaging="Tape and Reel", Pricing 1="1=0.1, 10=0.022, 50=0.022, 100=0.009, 1000=0.004, 10000=0.002 (USD)", Stock 1=134807, Supplier 1=Mouser
SW1: "Tactile Switch 3x4x2mm SMD 2-Pin", Case/Package=SMD, Manufacturer Part Number="3x4x2mm switch"
U1: library part ESP8080_1, "RF System on a Chip - SoC SIP module ESP32 with 4MByte Flash", Case/Package=QFN-48, Manufacturer Part Number=ESP32-PICO-D4
U2: library part GL823, "USB 2.0 SD/MMC Card Reader Controller version A", Case/Package=QFN24, Manufacturer Part Number="GL823 VERSION A"
U3: "Buffers & Line Drivers QUAD BUFFER 3-S", Case/Package=TSSOP-14, High Level Output Current=-32mA, Low Level Output Current=64mA, Manufacturer="NXP Semiconductors", Manufacturer Part Number=74ABT125PW,112, Max Operating Temperature=85°C, Max Supply Voltage=5.5V, Min Operating Temperature=-40°C, Min Supply Voltage=4.5V, Operating Supply Voltage=5V, Package Quantity=2400, Supplier Part Number 1=771-ABT125PW112, ComponentLink1Description=https://www.verical.com/server-webapp/html/getDatasheet?partID=194630&src-supplier=Verical, ComponentLink1URL=https://www.verical.com/server-webapp/html/getDatasheet?partID=194630&src-supplier=Verical, ComponentLink2Description=http://www.nxp.com/documents/data_sheet/74ABT125.pdf?src-supplier=Future+Electronics, ComponentLink2URL=http://www.nxp.com/documents/data_sheet/74ABT125.pdf?src-supplier=Future+Electronics, Contact Plating=Gold, Lead Free="Lead Free", Logic Function=Buffer,Inverting, Mount="Surface Mount", Number of Bits per Element=1, Number of Channels=4, Number of Elements=4, Number of Input Lines=4, Number of Inputs=4, Number of Output Lines=4, Number of Outputs=4, Number of Pins=14, Packaging=Rail/Tube, Polarity=Non-Inverting, Pricing 1="1=0.57, 10=0.472, 50=0.472, 100=0.304, 1000=0.244, 2500=0.206, 10000=0.198, 25000=0.19, 50000=0.187, 100000=0.183 (USD)", Propagation Delay=4.6ns, Radiation Hardening=No, Stock 1=2194, Supplier 1=Mouser, Turn-On Delay Time=6.8ns
U4 U7: "LDO Voltage Regulators 600mA CMOS LDO 50mA 3.3V 250mV", Case/Package=SOT-23-5, Dropout Voltage=250mV, Manufacturer=Diodes, Manufacturer Part Number=AP2112K-3.3TRG1, Max Input Voltage=6V, Max Operating Temperature=85°C, Max Output Current=600mA, Min Operating Temperature=-40°C, Output Voltage=3.3V, Package Quantity=1, Quiescent Current=55uA, Supplier Part Number 1=2098204, Accuracy=1.5%, ComponentLink1Description=http://www.diodes.com/datasheets/AP2112.pdf?src-supplier=Avnet, ComponentLink1URL=http://www.diodes.com/datasheets/AP2112.pdf?src-supplier=Avnet, ComponentLink2Description=https://www.diodes.com/assets/Datasheets/AP2112.pdf?src-supplier=Digi-Key, ComponentLink2URL=https://www.diodes.com/assets/Datasheets/AP2112.pdf?src-supplier=Digi-Key, Height=1.3mm, Lead Free="Lead Free", Length=3.1mm, Mount="Surface Mount", Number of Outputs=1, Number of Pins=5, Number of Regulators=1, Output Current=600mA, Output Type=Fixed, Packaging="Tape and Reel", Polarity=Positive, Stock 1=0, Supplier 1="Future Electronics", Width=1.7mm
U5: "Power Switch ICs -Autoswitching Pwr Mux 3-mm × 3-mm SON-8", Case/Package="SON-8 (3X3)", Current - Output 2=1.25A, Manufacturer="Texas Instruments", Max Input Voltage=5.5V, Max Operating Temperature=85°C, Min Input Voltage=2.8V, Min Operating Temperature=-40°C, Package Quantity=3000, Supplier Part Number 1=296-46373-1-ND, Category="Integrated Circuits (ICs)", ComponentLink1Description=https://datasheet.ciiva.com/15109/getdatasheetpartid-627486-15109322.pdf?src-supplier=Verical, ComponentLink1URL=https://datasheet.ciiva.com/15109/getdatasheetpartid-627486-15109322.pdf?src-supplier=Verical, ComponentLink2Description=https://datasheet.ciiva.com/3232/tps2112a-3232522.pdf?src-supplier=Avnet, ComponentLink2URL=https://datasheet.ciiva.com/3232/tps2112a-3232522.pdf?src-supplier=Avnet, ComponentLink3Description=https://datasheet.ciiva.com/1961/tps2113a-1961004.pdf?src-supplier=Digi-Key, ComponentLink3URL=https://datasheet.ciiva.com/1961/tps2113a-1961004.pdf?src-supplier=Digi-Key, Lead Free="Lead Free", Manufacturer Part Number=TPS2113ADRBR, Max Output Current=1.25A, Number of Inputs=2, Number of Outputs=1, Number of Pins=8, Operating Supply Voltage=5.5V, Output Current=1.25A, Packaging="Tape and Reel", Pricing 1="1=1.95000, 10=1.74900, 25=1.65000, 100=1.32000, 250=1.15500, 500=1.12200, 1000=0.89100 (USD)", Radiation Hardening=No, RoHS=Yes, Stock 1=3232, Supplier 1=Digi-Key, Turn-On Delay Time=1ms
U6: "IC BATT CHG LI-ION 1 CELL 10SON", Battery Pack Voltage=4.2V, Case/Package=WSON-10, Manufacturer="Texas Instruments", Max Charge Current=1A, Max Operating Temperature=85°C, Max Power Dissipation=1.66W, Max Supply Voltage=28V, Min Input Voltage=3.5V, Min Operating Temperature=-40°C, Min Supply Voltage=4.75V, Operating Supply Current=800uA, Output Current=800mA, Package Quantity=3000, Supplier Part Number 1=296-37142-1-ND, ComponentLink1Description=http://www.ti.com/lit/pdf/slyt420?src-supplier=Digi-Key, ComponentLink1URL=http://www.ti.com/lit/pdf/slyt420?src-supplier=Digi-Key, ComponentLink2Description=http://www.ti.com/general/docs/suppproductinfo.tsp?distId=10&gotoUrl=http%3A%2F%2Fwww.ti.com%2Flit%2Fgpn%2Fbq24040&src-supplier=Digi-Key, ComponentLink2URL=http://www.ti.com/general/docs/suppproductinfo.tsp?distId=10&gotoUrl=http%3A%2F%2Fwww.ti.com%2Flit%2Fgpn%2Fbq24040&src-supplier=Digi-Key, ComponentLink3Description=http://datasheet.iiic.cc/texas_instruments/BQ24040DSQR.pdf?src-supplier=IIIC, ComponentLink3URL=http://datasheet.iiic.cc/texas_instruments/BQ24040DSQR.pdf?src-supplier=IIIC, Fault Protection="Over Voltage,Over Temperature,Short Circuit", Lead Free="Lead Free", Manufacturer Part Number=BQ24040DSQR, Number of Cells=1, Number of Pins=10, Output Voltage=4.2V, Packaging="Tape and Reel", Pricing 1="1=1.26, 10=1.124, 25=1.0672, 100=0.8194, 250=0.7241, 500=0.686, 1000=0.5335 (USD)", REACH SVHC="No SVHC", Stock 1=20950, Supplier 1=Digi-Key

## Via types
v1: diameter 0.381, hole 0.203, Top Layer to Bottom Layer, tented both sides, 227 vias
v2: diameter 0.508, hole 0.254, Top Layer to Bottom Layer, tented both sides, 12 vias
v3: diameter 0.381, hole 0.203, Top Layer to Bottom Layer, 1 vias

## Nets (pads, with @x,y where several pads share a name; then routed paths per layer and width w, separated by ;. In a path a pad name is that pad's centre, name@x,y a point inside that pad or via, vN(x,y) a via of type N, cw(c..) or ccw(c..) an arc to the next point about the centre after c; other vN are vias at no path point)
ADC2_CH2: R13.2 R19.1 U1.22 | length 9.8
  Top Layer w0.254: v1(9.698,16.016) 9.698,13.842 R13.2 9.703,13.839 R19.1 ; v1(9.86,21.682) 9.894,21.682 9.971,21.759 U1.22
  Bottom Layer w0.254: v1(9.698,16.016) 9.698,21.487 9.86,21.648 v1(9.86,21.682)
BOOT: Q4.3 U1.23 | length 22.8
  Top Layer w0.152: U1.23 10.204,21.259 9.982,21.037 9.982,19.738 11.208,18.512 15.58,18.512 16.039,18.053 16.039,7.136 v1(16.04,7.134) ; v1(17.739,7.081) 18.368,6.452 Q4.3
  Bottom Layer w0.152: v1(16.04,7.134) 17.685,7.134 v1(17.739,7.081)
CD/DAT3: J2.2 U2.18 U3.8 | length 37.2
  Top Layer w0.152: v1(11.913,12.7) 11.913,6.248 v1(12.192,5.969)
  Top Layer w0.254: U2.18 3.853,27.149 v1(3.853,28.143)
  Bottom Layer w0.152: v1(3.853,28.143) 4.361,28.651 9.83,28.651 11.102,27.379 11.102,14.374 11.227,14.249 11.448,14.249 J2.2 11.2,13.057 11.513,12.744 11.869,12.744 v1(11.913,12.7) ; U3.8 7.065,7.68 9.677,7.68 11.388,5.969 v1(12.192,5.969)
CLK1: J2.5 U2.12 U3.6 | length 24.8
  Top Layer w0.254: U2.12 8.106,26.249 8.781,26.924 v1(9.195,26.924)
  Bottom Layer w0.152: v1(9.195,26.924) 9.705,26.414 9.705,23.134 9.28,22.709 9.28,17.002 7.9,15.622 J2.5 7.9,13.08 8.738,12.242 9.572,12.242 11.74,10.074 11.74,8.816 12.229,8.327 U3.6
CMD1: J2.3 U2.16 U3.3 | length 25.6
  Top Layer w0.254: U2.16 v1@4.85,28.092
  Bottom Layer w0.152: v1@4.85,28.092 9.643,28.092 10.316,27.42 10.316,14.217 J2.3 10.1,12.219 12.042,10.277 U3.3
  other v1: 4.85,28.143
DAT0: J2.7 R5.1 U2.11 | length 25.5
  Top Layer w0.152: v1(5.657,8.468) 5.669,8.481 6.833,8.481 8.379,10.028 8.379,10.903 9.35,11.874 v1(9.419,11.874)
  Top Layer w0.254: U2.11 v1(8.411,25.749)
  Bottom Layer w0.152: R5.1 5.657,9.177 v1(5.657,8.468) ; v1(8.411,25.749) 8.411,24.276 7.133,22.998 7.133,16.335 5.7,14.902 J2.7 5.7,13.551 6.593,12.658 7.782,12.658 8.566,11.874 v1(9.419,11.874)
DTS: H1.1 Q4.2 R11.1 | length 3.8
  Top Layer w0.254: R11.1 18.857,5.25 Q4.2 18.768,5.511 18.996,5.74 H1.1
EN: C7.2 Q3.3 R1.2 SW1.2 U1.9 | length 36.6
  Top Layer w0.152: v1(12.958,17.06) 13.115,17.06 SW1.2 ; v1(18.368,1.109) Q3.3
  Top Layer w0.254: v1(12.388,28.27) 12.431,28.314 12.616,28.314 C7.2@13.043,28.74 ; U1.9 C7.2@13.043,28.74 ; R1.2 13.058,28.766 C7.2 13.043,28.75 C7.2@13.043,28.74
  Bottom Layer w0.152: v1(12.388,28.27) 11.975,27.857 11.975,17.06 12.016,17.06 ; v1(12.958,17.06) 12.016,17.06 ; v1(18.368,1.109) 18.368,1.196 18.152,1.412 18.152,11.464 16.694,12.922 14.489,12.922 13.148,14.264 13.148,15.224 12.016,16.356 12.016,17.06
ESP_CLK: R6.2 U1.35 | length 12.8
  Top Layer w0.152: U1.35 16.543,19.36 17.174,18.728 17.174,10.351 v1(17.407,10.118)
  Bottom Layer w0.152: R6.2 15.347,8.915 16.549,10.118 v1(17.407,10.118)
ESP_CS: R3.2 R7.1 U1.34 U3.13 | length 26.1
  Top Layer w0.152: U1.34 16.043,19.322 16.768,18.596 16.768,9.889 v1(17.011,9.647)
  Top Layer w0.254: v1(8.805,10.808) 9.487,10.808 R7.1
  Bottom Layer w0.152: R3.2@5.554,11.025 5.652,10.927 U3.13 7.181,10.808 v1(8.805,10.808) 8.987,10.626 8.987,10.414 12.263,7.138 13.721,7.138 14.313,7.73 14.959,7.73 16.876,9.647 v1(17.011,9.647)
ESP_MISO: U1.38 U3.11 | length 25.9
  Top Layer w0.152: v1(17.59,9.459) 17.932,9.8 17.932,17.867 18.848,18.783 18.848,20.928 18.517,21.259 U1.38
  Bottom Layer w0.152: U3.11 9.127,9.627 11.937,6.817 13.939,6.817 14.453,7.331 15.385,7.331 17.512,9.459 v1(17.59,9.459)
ESP_MOSI: R4.2 U1.36 | length 11.4
  Top Layer w0.152: U1.36 17.043,19.429 17.563,18.908 v1(17.563,10.915)
  Bottom Layer w0.254: R4.2 15.506,10.915 v1(17.563,10.915)
EXT_5V: C16.2 D1.1 U5.8 U6.1 | length 0.3
  Top Layer w0.254: D1.1@1.225,3.054 D1.1@1.432,3.261
FLASH_CLK: U1.31
FLASH_CS: U1.25
FLASH_SD0: U1.27
FLASH_SD1: U1.33
FLASH_SD2: U1.30
FLASH_SD3: U1.32
GND: C1.2 C2.2 C3.1 C4.2 C7.1 C8.1 C9.1 C10.1 C11.1 C13.2 C14.2 C16.1 D2.2 D3.2 D4.2 D5.2 H1.3 J1.2 J2.6 J3.4 J3.5 J3.6 R2.2 R10.2 R14.2 R16.1 R17.2 R18.2 R19.2 SW1.1 U1.49 U2.8 U2.21 U2.22 U2.24 U2.25 U3.7 U4.2 U5.2 U5.3 U5.5 U5.9 U6.3 U6.11 U7.2 | length 10.8
  Top Layer w0.254: U6.3@1.321,12.735 U6.11@1.321,13.868 ; U5.9@1.88,6.633 1.874,6.627 U5.2 1.922,5.361 1.922,4.806 2.097,4.631 2.097,4.621 ; R18.2 1.978,16.069 2.21,16.069 v3(2.22,16.059) ; U5.3 2.524,6.438 U5.9@2.579,6.493 ; U5.5 3.174,7.346 U5.9@3.221,7.3